# Altium PCB TennisButler PCB.PcbDoc (part 2 of 3)
Units mm, origin at the board's own origin, x right, y up, seen from the top; angles counter-clockwise.
Board outline 100 x 100 mm, 2 copper layers (Top Layer, Bottom Layer), stack 1.671 mm thick; 98 components, 100 nets, 459 pads, 232 vias.
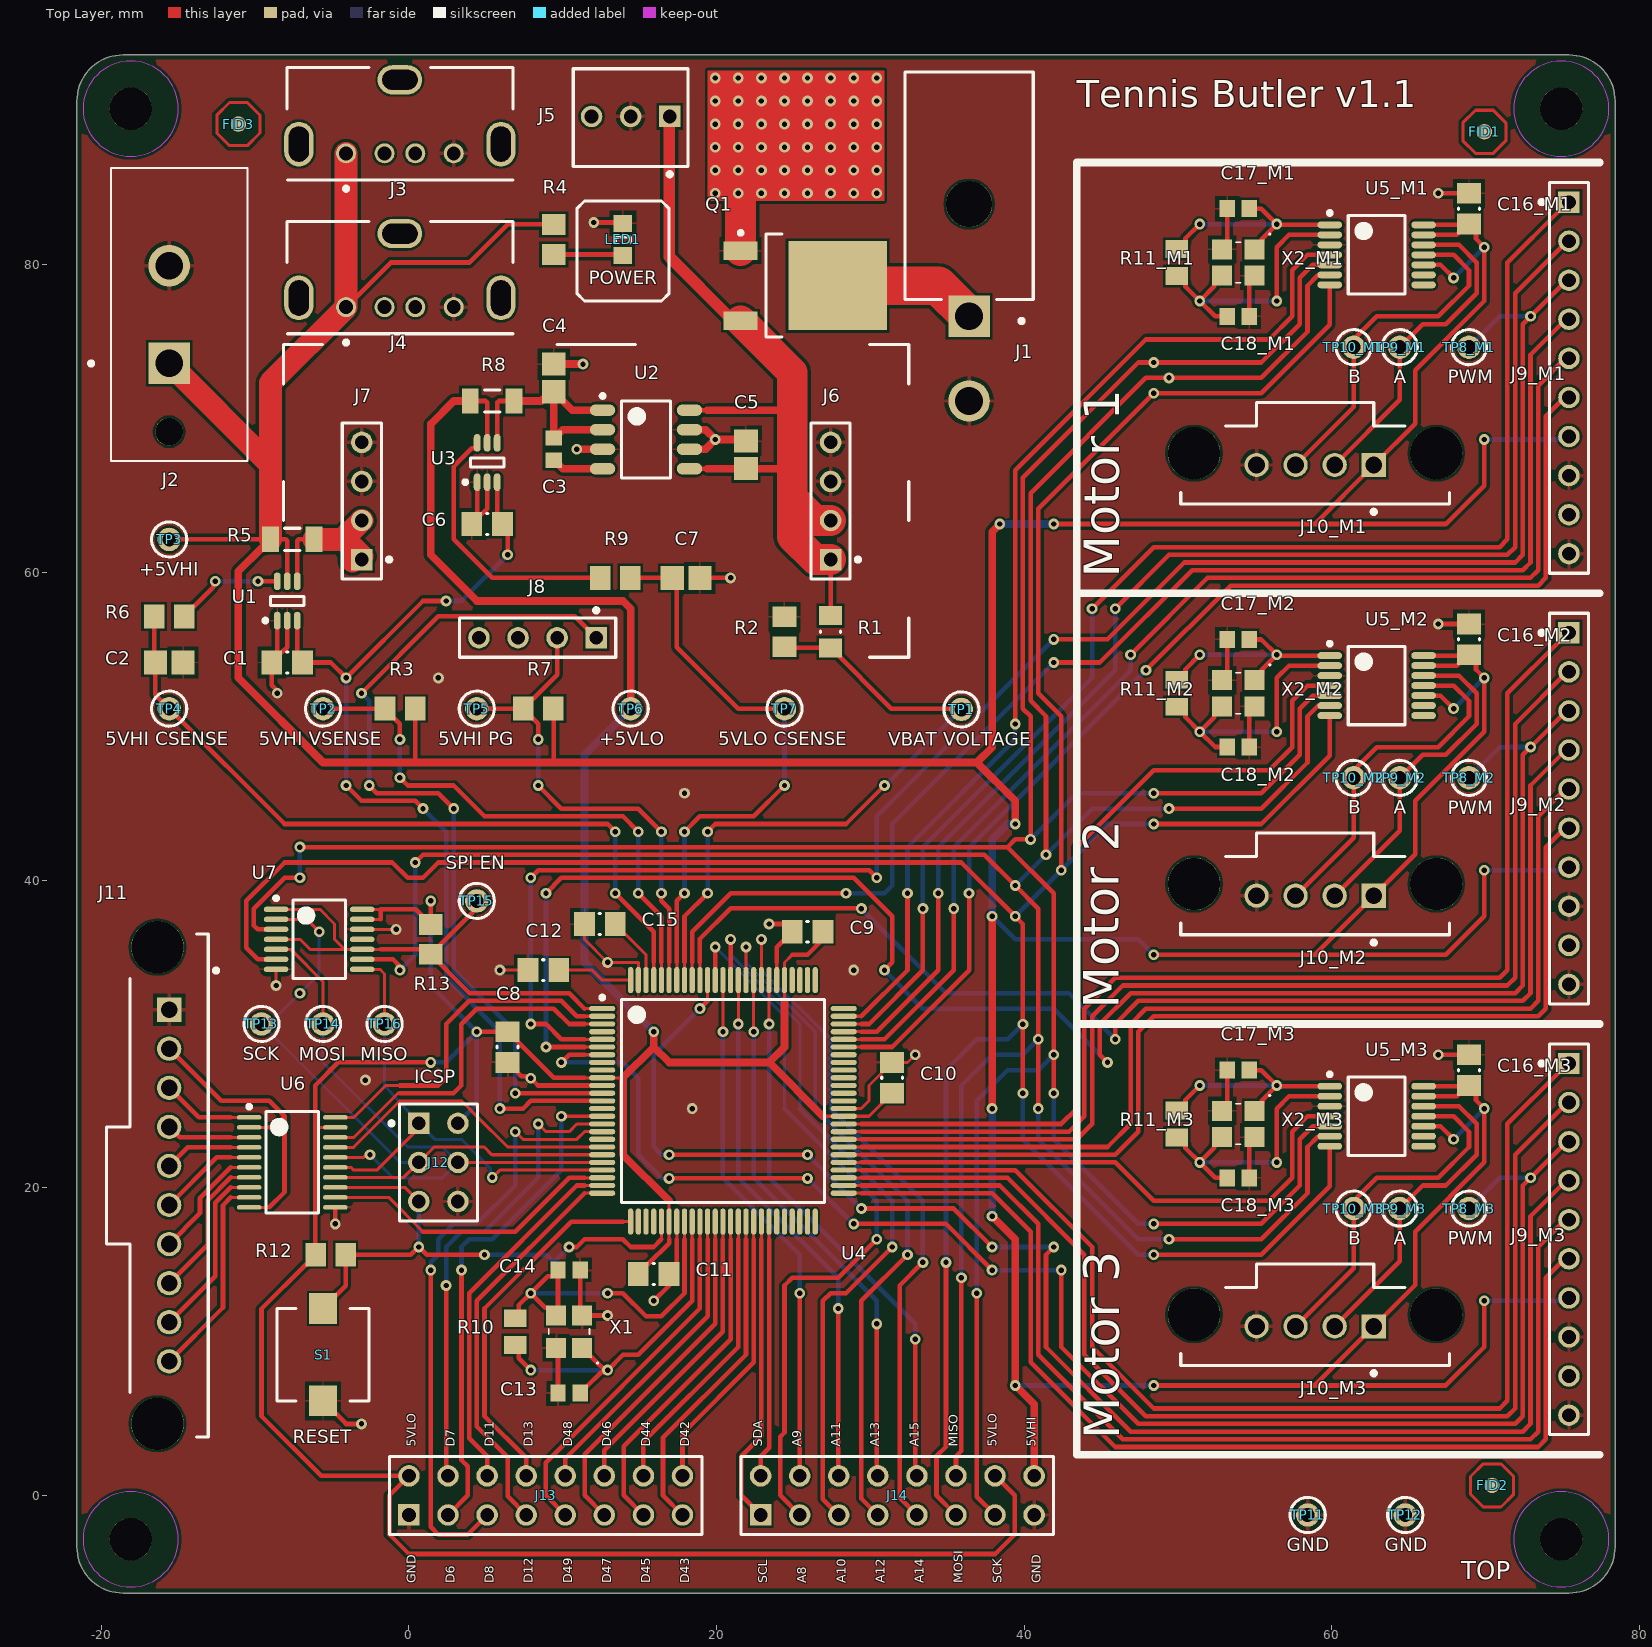
[diagram p0: Top Layer view]

## Part data (continued)
X1: library part FC3BACAGI16.0-T3, "CRYSTAL16MHZ 12PF SMD", Manufacturer="Fox Electronics", Supplier Part Number 1=631-1490-1-ND, ClassName=MCU, ComponentLink1Description=Datasheet, ComponentLink1URL=http://www.foxonline.com/pdfs/C3BA.pdf, Manufacturer Part Number=FC3BACAGI16.0-T3, Pricing 1="1 = 0.510000, 10 = 0.422000, 50 = 0.379400, 100 = 0.337300, 500 = 0.320400, 1000 = 0.269810 (USD)", RoHS 1=No, Stock 1=2804, Supplier 1=Digi-Key
X2_M1 X2_M2 X2_M3: library part 603-40-48, "CRYSTAL 40MHZ 12PF SMD", Manufacturer="Fox Electronics", Supplier Part Number 1=631-1480-1-ND, ComponentLink1Description=Datasheet, ComponentLink1URL=https://www.foxonline.com/pdfs/603-40-48.pdf?src-supplier=Digi-Key, Manufacturer Part Number=603-40-48, Pricing 1="1 = 0.840000, 10 = 0.744000, 50 = 0.695400, 100 = 0.614500, 500 = 0.582120, 1000 = 0.485100 (USD)", RoHS 1=No, Stock 1=3916, Supplier 1=Digi-Key

## Free pads (board coordinates)
  round 2.75 hole 2.75 unplated mask+0: M2.5(-18.09,-2.85) M2.5(-18.09,90.15) M2.5(74.91,-2.85) M2.5(74.91,90.15)

## Via types
v1: diameter 0.7, hole 0.35, Top Layer to Bottom Layer, 117 vias
v2: diameter 0.7, hole 0.35, Top Layer to Bottom Layer, tented both sides, 115 vias

## Nets (pads, with @x,y where several pads share a name; then routed paths per layer and width w, separated by ;. In a path a pad name is that pad's centre, name@x,y a point inside that pad or via, vN(x,y) a via of type N, cw(c..) or ccw(c..) an arc to the next point about the centre after c; other vN are vias at no path point)
5VHI_CURRENT: C2.2 R6.2 TP4.1 U4.97 | length 49.4
  Top Layer w0.2: U4.97@15.91,33.5 15.91,34.65
  Top Layer w0.3: C2.2@-16.59,54.15 -16.565,54.175 R6.2@-16.565,57.15 ; C2.2@-16.49,54.15 -16.49,52.05 TP4.1@-15.59,51.15 -8.09,43.65 12.91,43.65 v1(13.41,43.15) ; v1(13.41,39.15) 15.91,36.65 15.91,34.65
  Bottom Layer w0.3: v1(13.41,39.15) v1(13.41,43.15)
5VHI_EN: J8.1 U4.12 | length 56
  Top Layer w0.3: v2(-3.09,52.15) 1.91,57.15 10.78,57.15 J8.1@12.17,55.76 ; v1(-2.59,46.15) -2.09,45.65 1.91,45.65 v1(2.91,44.65) ; v1(6.91,26.15) U4.12@12.56,26.15
  Bottom Layer w0.3: v2(-3.09,52.15) -2.59,51.65 v1(-2.59,46.15) ; v1(2.91,44.65) 2.91,34.15 6.91,30.15 v1(6.91,26.15)
5VHI_PG: J8.2 R7.1 TP5.1 U4.95 | length 33.1
  Top Layer w0.2: U4.95@16.91,33.5 16.91,34.65
  Top Layer w0.3: TP5.1@4.41,51.15 R7.1@7.435,51.15 ; v1(8.41,46.15) 9.91,44.65 14.91,44.65 v1(16.41,43.15) ; v2(8.41,49.15) 8.41,50.175 R7.1@7.435,51.15 ; J8.2@9.63,55.76 9.63,53.345 8.058,51.773 7.958,51.773 7.435,51.25 R7.1@7.435,51.15 ; v1(16.41,39.15) 16.41,38.65 16.91,38.15 16.91,34.65
  Bottom Layer w0.3: v1(8.41,46.15) v2(8.41,49.15) ; v1(16.41,39.15) v1(16.41,43.15)
5VHI_VOLTAGE: R3.2 TP2.1 U4.96 | length 36.1
  Top Layer w0.2: U4.96@16.41,33.5 16.41,34.65
  Top Layer w0.3: TP2.1@-5.59,51.15 R3.2@-1.59,51.15 ; R3.2@-1.565,51.15 -0.59,50.175 v2(-0.59,49.15) ; v1(-0.59,46.65) -0.09,46.15 2.91,46.15 4.91,44.15 13.91,44.15 v1(14.91,43.15) ; v1(14.91,39.15) 16.41,37.65 16.41,34.65
  Bottom Layer w0.3: v1(-0.59,46.65) v2(-0.59,49.15) ; v1(14.91,39.15) v1(14.91,43.15)
5VLO_CURRENT: C7.2 R9.2 TP7.1 U4.94 | length 38.6
  Top Layer w0.2: U4.94@17.41,33.5 17.41,34.65
  Top Layer w0.3: R9.2@14.385,59.65 C7.2@17.114,59.65 17.41,59.354 17.41,55.15 21.41,51.15 TP7.1@24.41,51.15 ; 17.41,34.65 17.41,38.65 v1(17.91,39.15) ; v1(17.91,43.15) 18.91,44.15 22.41,44.15 v1(24.41,46.15)
  Bottom Layer w0.3: v1(17.91,39.15) v1(17.91,43.15) ; v1(24.41,46.15) TP7.1@24.41,51.15
+5VHI: C16_M1.2 C16_M2.2 C16_M3.2 J2.1 J3.1 J4.1 J9_M1.7 J9_M2.7 J9_M3.7 J10_M1.1 J10_M2.1 J10_M3.1 J14.16 R3.1 R4.2 R5.2 R7.2 TP3.1 U1.5 U5_M1.10 U5_M1.13 U5_M1.14 U5_M2.10 U5_M2.13 U5_M2.14 U5_M3.10 U5_M3.13 U5_M3.14 | length 426
  Top Layer w0.3: TP3.1@-15.54,62.15 R5.2@-9.015,62.15 ; R5.2@-8.995,62.15 -8.008,62.15 -7.915,62.057 U1.5@-7.915,59.425 ; J4.1@-4.09,77.25 -1.19,80.15 3.91,80.15 6.41,82.65 R4.2@9.41,82.65 ; 0.41,47.65 R3.1@0.41,51.15 ; R7.2@9.385,51.15 9.41,51.125 9.41,47.65 ; v1(41.91,63.15) 58.88,63.15 ; v1(48.41,7.15) 58.88,7.15 ; v1(48.41,35.15) 58.88,35.15 ; U5_M3.10@65.96,24 67.06,24 v2(67.91,23.15) ; U5_M3.13@65.96,25.95 68.11,25.95 C16_M3.2@68.76,26.6 ; U5_M3.14@65.96,26.6 C16_M3.2@68.76,26.6 ; U5_M2.10@65.96,52 67.06,52 v2(67.91,51.15) ; U5_M2.13@65.96,53.95 68.11,53.95 C16_M2.2@68.76,54.6 ; U5_M2.14@65.96,54.6 C16_M2.2@68.76,54.6 ; U5_M1.10@65.96,80 67.06,80 v2(67.91,79.15) ; U5_M1.13@65.96,81.95 68.11,81.95 C16_M1.2@68.76,82.6 ; U5_M1.14@65.96,82.6 C16_M1.2@68.76,82.6 ; C16_M3.2@68.86,26.6 C16_M3.2@68.76,26.6 ; C16_M2.2@68.86,54.6 C16_M2.2@68.76,54.6 ; C16_M1.2@68.86,82.6 C16_M1.2@68.76,82.6 ; C16_M3.2@68.91,26.65 69.364,26.196 69.364,25.696 v2(69.91,25.15) 69.91,21.65 65.41,17.15 65.41,13.68 58.88,7.15 ; C16_M2.2@68.91,54.65 69.364,54.196 69.364,53.696 v2(69.91,53.15) 69.91,49.65 65.41,45.15 65.41,41.68 58.88,35.15 ; C16_M1.2@68.91,82.65 69.364,82.196 69.364,81.696 v2(69.91,81.15) 69.91,77.65 65.41,73.15 65.41,69.68 J10_M1.1@62.72,66.99 58.88,63.15 ; v1(69.91,12.65) 69.91,9.65 67.41,7.15 58.88,7.15 ; v1(69.91,40.65) 69.91,37.65 67.41,35.15 58.88,35.15 ; v1(69.91,68.65) 69.91,65.65 67.41,63.15 58.88,63.15
  Top Layer w0.5: R5.2@-9.015,62.15 -9.015,61.875 -9.311,61.579 -9.586,61.579 -11.09,60.075 -11.09,53.15 -5.59,47.65 0.41,47.65 9.41,47.65 36.91,47.65 ; v1(37.91,18.15) 39.41,16.65 v1(39.41,7.15) 40.64,5.92 J14.16@40.64,1.27 ; v1(37.91,25.15) v1(37.91,37.65) ; v1(38.41,63.15) 37.91,62.65 37.91,48.65 36.91,47.65 ; v1(39.41,43.65) 39.41,45.15 36.91,47.65
  Top Layer w1.5: J2.1@-15.59,73.595 -9.015,67.02 ; R5.2@-9.015,62.15 -9.015,67.02 ; J3.1@-4.09,87.25 J4.1@-4.09,77.25 -9.015,72.325 -9.015,67.02
  Bottom Layer w0.3: v1(37.91,37.65) 39.41,36.15 47.41,36.15 v1(48.41,35.15) ; v1(39.41,7.15) v1(48.41,7.15) ; v2(67.91,23.15) v2(69.91,25.15) ; v2(67.91,51.15) v2(69.91,53.15) ; v2(67.91,79.15) v2(69.91,81.15) ; v1(69.91,12.65) 75.22,12.65 J9_M3.7@75.41,12.84 ; v1(69.91,40.65) 75.22,40.65 J9_M2.7@75.41,40.84 ; v1(69.91,68.65) 75.22,68.65 J9_M1.7@75.41,68.84
  Bottom Layer w0.5: v1(37.91,18.15) v1(37.91,25.15) ; v1(37.91,37.65) 37.91,42.65 38.91,43.65 v1(39.41,43.65) ; v1(38.41,63.15) v1(41.91,63.15)
+5VLO: C8.2 C9.2 C10.2 C11.2 J12.2 J13.2 J14.14 R8.2 R12.2 R13.2 TP6.1 U3.5 U4.10 U4.31 U4.61 U4.80 U6.19 U7.13 U7.14 | length 241
  Top Layer w0.2: -6.09,23.925 U6.19@-4.79,23.925 ; U7.13@-3.04,37.45 -1.84,37.45 ; U7.14@-3.04,38.1 -1.84,38.1 ; 11.41,27.15 U4.10@12.56,27.15 13.91,27.15 ; 16.91,16.65 U4.31@16.91,17.8 16.91,19.15 ; 24.41,32.15 U4.80@24.41,33.5 24.41,34.65 24.91,35.15 ; 26.91,24.65 U4.61@28.26,24.65 29.91,24.65 C10.2@31.41,26.15
  Top Layer w0.3: -1.84,37.45 -1.84,38.1 0.435,38.1 R13.2@1.41,37.125 v2(1.41,38.65) ; v1(1.41,28.15) -4.59,28.15 -6.09,26.65 -6.09,23.925 -6.09,15.675 R12.2@-6.065,15.65 -6.065,15.55 -6.59,15.025 -6.69,15.025 -9.59,12.125 -9.59,5.15 -5.71,1.27 J13.2@0,1.27 -1.27,0 -1.27,-2.54 0,-3.81 38.1,-3.81 39.37,-2.54 39.37,0 J14.14@38.1,1.27 ; R8.2@3.985,71.15 4.992,71.15 5.085,71.057 U3.5@5.085,68.425 ; v2(4.41,30.15) C8.2@6.41,30.15 6.51,30.15 7.033,29.627 7.033,29.527 9.41,27.15 11.41,27.15 ; C11.2@14.91,14.4 14.91,14.5 15.433,15.023 15.533,15.023 16.91,16.4 16.91,16.65 ; 24.91,35.15 25.91,35.15 26.91,36.15 C9.2@26.91,36.65
  Top Layer w0.5: R8.2@3.985,71.15 2.91,71.15 1.41,69.65 1.41,61.15 4.41,58.15 13.91,58.15 14.41,57.65 TP6.1@14.41,51.15 ; C11.2@14.799,14.511 C11.2@14.91,14.4 ; v2(15.91,30.15) 15.91,29.15 ; 16.91,19.15 13.91,22.15 13.91,27.15 15.91,29.15 ; 24.41,32.15 24.41,29.15 23.41,28.15 ; 26.91,24.65 23.41,28.15 ; 15.91,29.15 16.91,28.15 23.41,28.15
  Bottom Layer w0.3: v1(1.41,28.15) 2.41,28.15 v2(4.41,30.15) ; v2(1.41,38.65) 1.41,33.15 v2(4.41,30.15) ; J12.2@3.18,24.19 4.41,25.42 v2(4.41,30.15)
  Bottom Layer w0.5: TP6.1@14.41,51.15 11.41,48.15 11.41,34.65 v2(15.91,30.15)